# EAGLE board Zaxis1 (EAGLE 9.6.2)
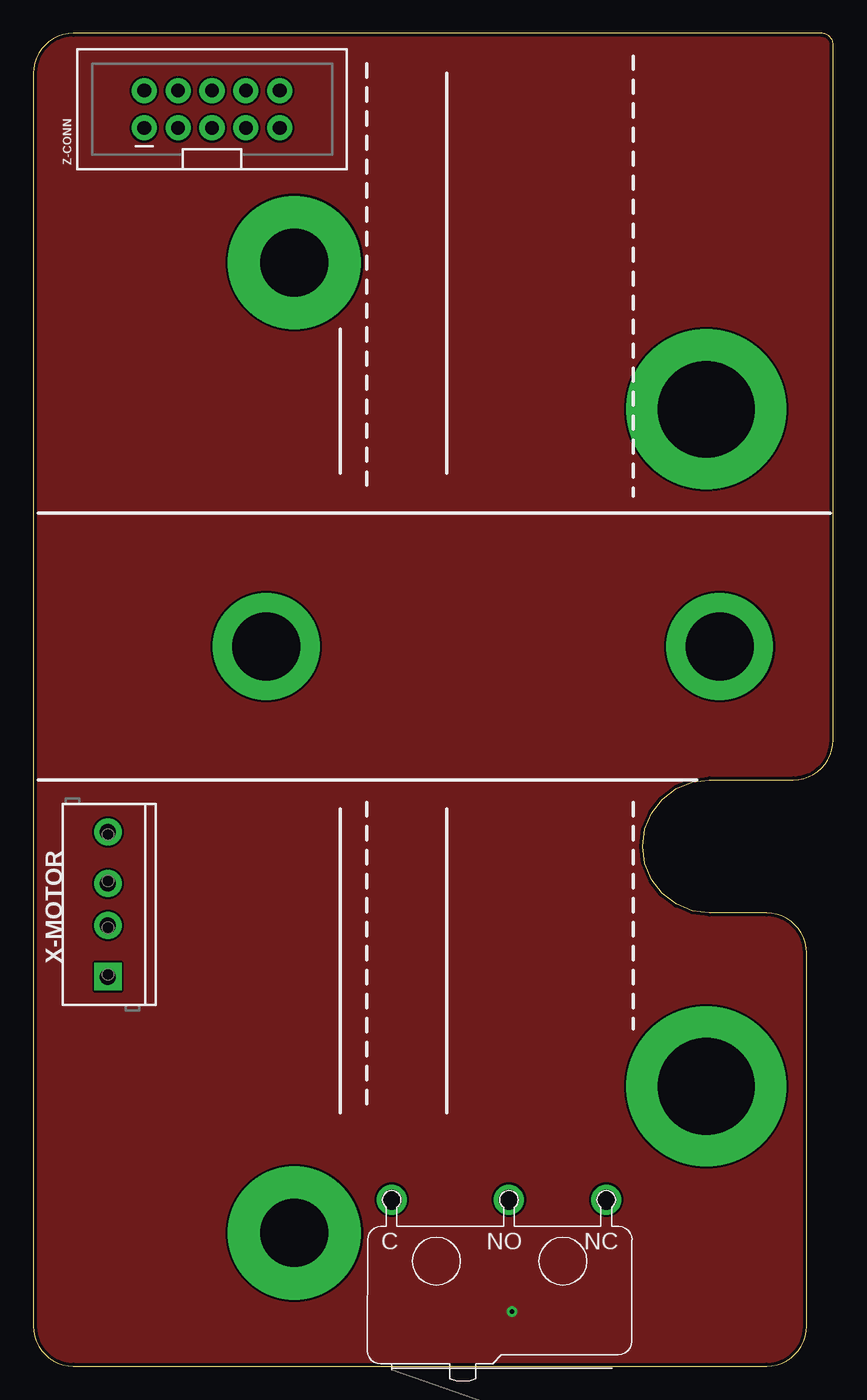
[diagram p0: board, top side]
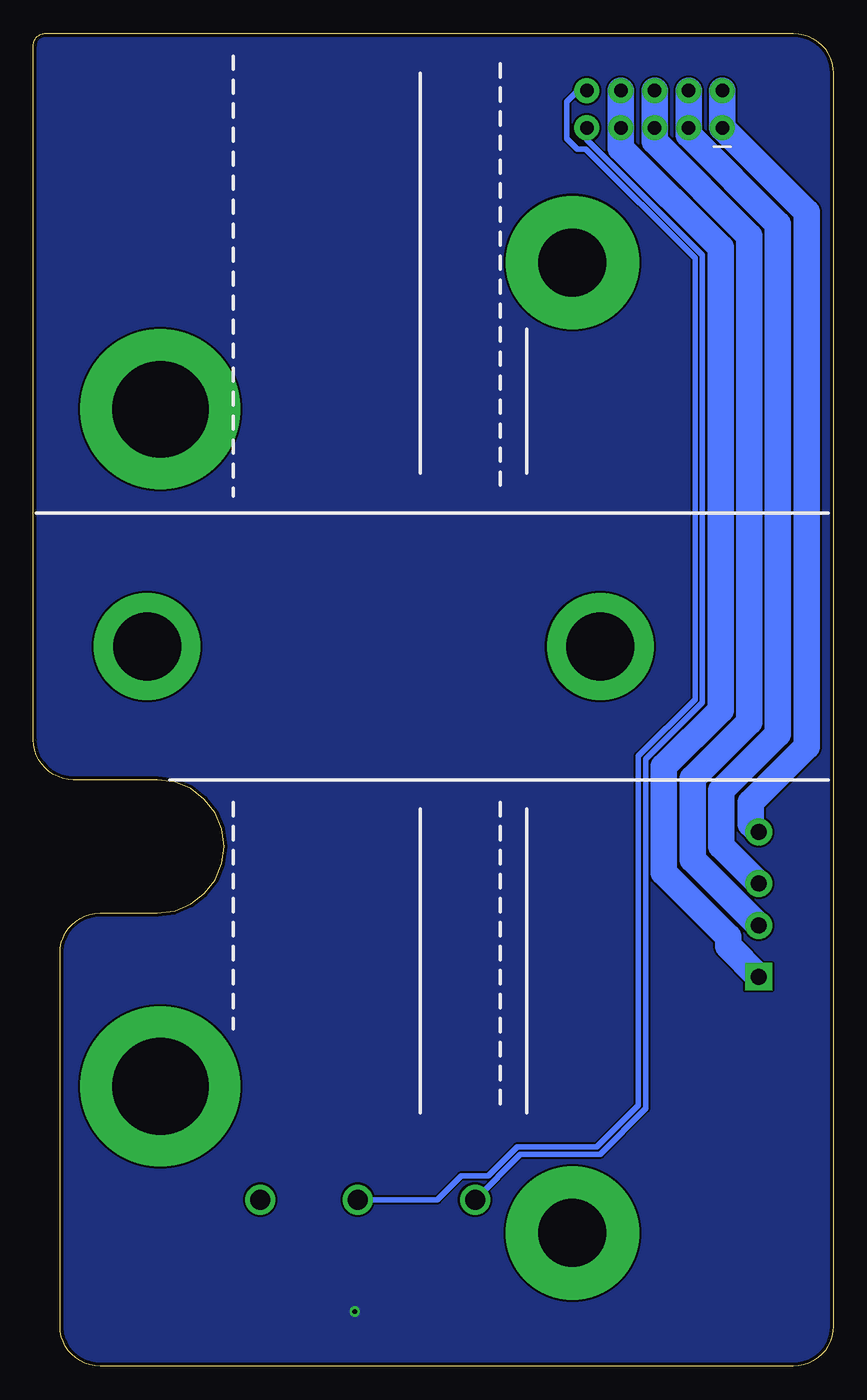
[diagram p1: board, bottom side, seen from below]

Size 60 x 100 mm. Coordinates in mm from the lower left corner, seen from the top.
Outline: 60,47 60,99.1 arc90 59.1,100 3,100 2.61,99.97 2.22,99.9 1.85,99.77 1.5,99.6 1.17,99.38 0.88,99.12 0.62,98.83 0.4,98.5 0.23,98.15 0.1,97.78 0.03,97.39 0,97 0,3 0.03,2.61 0.1,2.22 0.23,1.85 0.4,1.5 0.62,1.17 0.88,0.88 1.17,0.62 1.5,0.4 1.85,0.23 2.22,0.1 2.61,0.03 3,0 55,0 55.39,0.03 55.78,0.1 56.15,0.23 56.5,0.4 56.83,0.62 57.12,0.88 57.38,1.17 57.6,1.5 57.77,1.85 57.9,2.22 57.97,2.61 58,3 58,31 57.97,31.39 57.9,31.78 57.77,32.15 57.6,32.5 57.38,32.83 57.12,33.12 56.83,33.38 56.5,33.6 56.15,33.77 55.78,33.9 55.39,33.97 55,34 50.7,34 49.41,34.17 48.2,34.67 47.16,35.46 46.37,36.5 45.87,37.71 45.7,39 45.87,40.29 46.37,41.5 47.16,42.54 48.2,43.33 49.41,43.83 50.7,44 57,44 57.39,44.03 57.78,44.1 58.15,44.23 58.5,44.4 58.83,44.62 59.12,44.88 59.38,45.17 59.6,45.5 59.77,45.85 59.9,46.22 59.97,46.61 60,47
Copper layers (1*16): Top 0.035mm / dielectric 1.5mm / Bottom 0.035mm
Design rules "default *": minimum track width 6mil, minimum drill 0.35mm, track to track 6mil, track to pad 6mil, pad to pad 6mil, via to via 6mil, smd to smd 6mil, copper to edge 10mil, drill to drill 6mil, minimum pad ring 10mil, minimum via ring 8mil, stop-mask expansion 4mil, vias tented up to drill 0mil, thermal gap 10mil
Net classes: 0 default: width 0.203 mm, clearance 0.152 mm

## Footprints (pad centres in the part's own frame; a part is rotated, then mirrored left to right if it is on the bottom)
SCREWTERMINAL-3.5MM-4_LOCK = drill 1.2 pad 2.032 square: 1 -0.178,0 | drill 1.2 pad 2.032: 2 3.678,0; 3 6.822,0; 4 10.678,0
2X5-SHROUDED_LOCK = drill 1.016 pad 1.88: 1 -1.397,5.08; 2 1.397,5.08; 3 -1.397,2.54; 4 1.397,2.54; 5 -1.397,0; 6 1.397,0; 7 -1.397,-2.54; 8 1.397,-2.54; 9 -1.397,-5.08; 10 1.397,-5.08
LEVERMICROPCB-LEFTANGLE = drill 1.5: C 7.3,-7.1; NC -8.8,-7.1; NO -1.5,-7.1

## Placement (x,y rotation side)
X-MOTOR  [SCREWTERMINAL-3.5MM-4_LOCK]  5.6,29.4 90 top
Z-CONN  [2X5-SHROUDED_LOCK]  13.4,94.3 90 top
ZENDSTOP  Lever Microswitch Leftangle PCB mount, with Roller style lever, with a red roller  [LEVERMICROPCB-LEFTANGLE]  34.17,5.4 180 top

## Library data of the parts
X-MOTOR = SparkFun-Connectors
Z-CONN = SparkFun-Connectors; PROD_ID: CONN-08671; SF_ID: PRT-08506
ZENDSTOP = Lever Microswitch Right Angle

## Nets
X-MOTOR-1: X-MOTOR.1 Z-CONN.7 Z-CONN.8
X-MOTOR-2: X-MOTOR.2 Z-CONN.5 Z-CONN.6
X-MOTOR-3: X-MOTOR.3 Z-CONN.3 Z-CONN.4
X-MOTOR-4: X-MOTOR.4 Z-CONN.1 Z-CONN.2
Z-ENDSTOP-C: Z-CONN.9 ZENDSTOP.C
Z-ENDSTOP-NO: Z-CONN.10 ZENDSTOP.NO

## Tracks (layer width: path | path; a pad name or v marks a point on that pad's centre or on a via)
GND  (via drill 0.35)
  other vias: 35.9,4.1
  pour Bottom: -2.2,102.5 -2.2,-0.9 0.7,-3.8 59,-3.8 61.8,-1 61.8,99.6 59.9,101.5 58.9,102.5 -2.1,102.5
  pour Top: -0.1,102.1 -0.1,-1.3 2.8,-4.2 61.1,-4.2 63.9,-1.4 63.9,99.2 62,101.1 61,102.1 0,102.1
N$13  (via drill 5.1 pad 10)
  other vias: 19.57,82.8
N$14  (via drill 5.1 pad 8)
  other vias: 17.47,54
N$15  (via drill 7.25 pad 12)
  other vias: 50.47,71.8
N$16  (via drill 5.1 pad 8)
  other vias: 51.47,54
N$17  (via drill 7.25 pad 12)
  other vias: 50.47,21
X-MOTOR-1
  Bottom 2: Z-CONN.8 Z-CONN.7 15.94,91.39 8.46,83.91 8.46,49.24 12.7,44.99 12.7,37.03 7.9,32.22 7.9,31.52 X-MOTOR.1
X-MOTOR-2
  Bottom 2: Z-CONN.6 Z-CONN.5 13.4,91.89 6.31,84.8 6.31,48.34 10.55,44.09 10.55,38.03 X-MOTOR.2
X-MOTOR-3
  Bottom 2: Z-CONN.4 Z-CONN.3 10.86,92.4 4.15,85.69 4.15,47.45 8.4,43.2 8.4,39.02 X-MOTOR.3
X-MOTOR-4
  Bottom 2: Z-CONN.2 Z-CONN.1 2,86.58 2,46.48 6.2,42.28 6.2,40.68 X-MOTOR.4
Z-ENDSTOP-C
  Bottom 0.406: Z-CONN.9 18.48,92.01 9.81,83.35 9.81,49.8 14.06,45.56 14.06,19.34 17.5,15.9 23.47,15.9 ZENDSTOP.C
Z-ENDSTOP-NO
  Bottom 0.406: ZENDSTOP.NO 29.7,12.5 27.9,14.3 25.86,14.3 23.7,16.46 17.73,16.46 14.62,19.57 14.62,45.79 10.37,50.04 10.37,83.11 18.56,91.3 19.2,91.3 20,92.1 20,94.88 19.18,95.7 Z-CONN.10
ZCARGND  (via drill 5.1 pad 10)
  other vias: 19.57,10